# Altium PCB FM Trap.PcbDoc
Units mm, origin at the board's own origin, x right, y up, seen from the top; angles counter-clockwise.
Board outline 19 x 19 mm, 2 copper layers (Top Layer, Bottom Layer); 6 components, 5 nets, 16 pads, 0 vias.
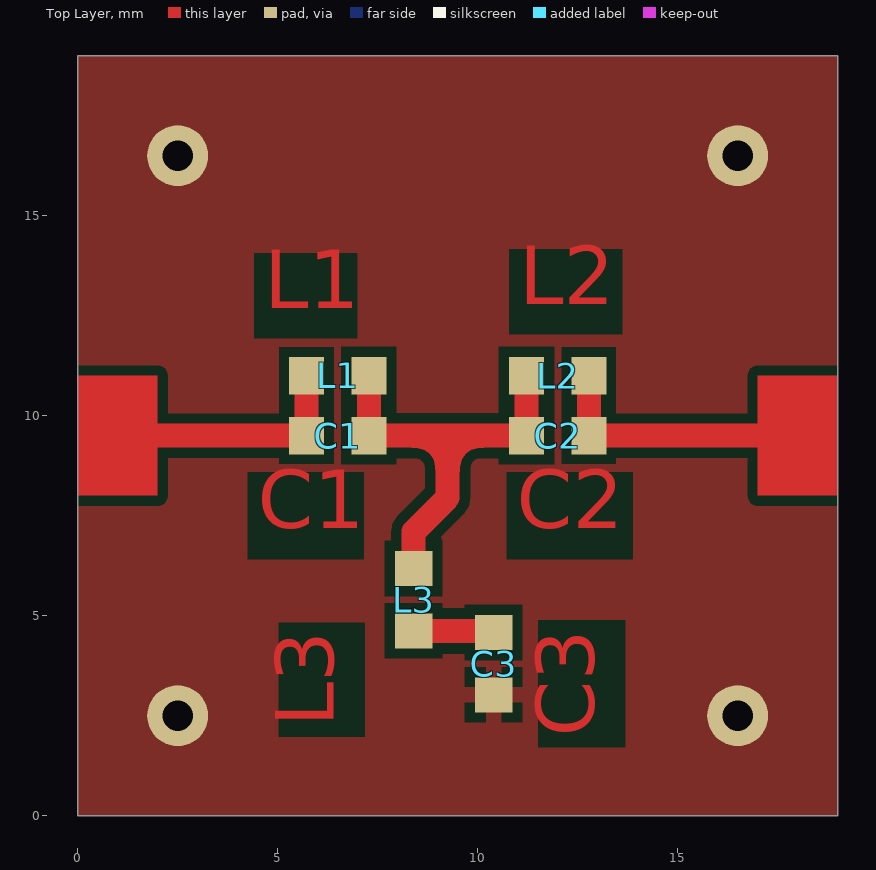
[diagram p0: Top Layer view]
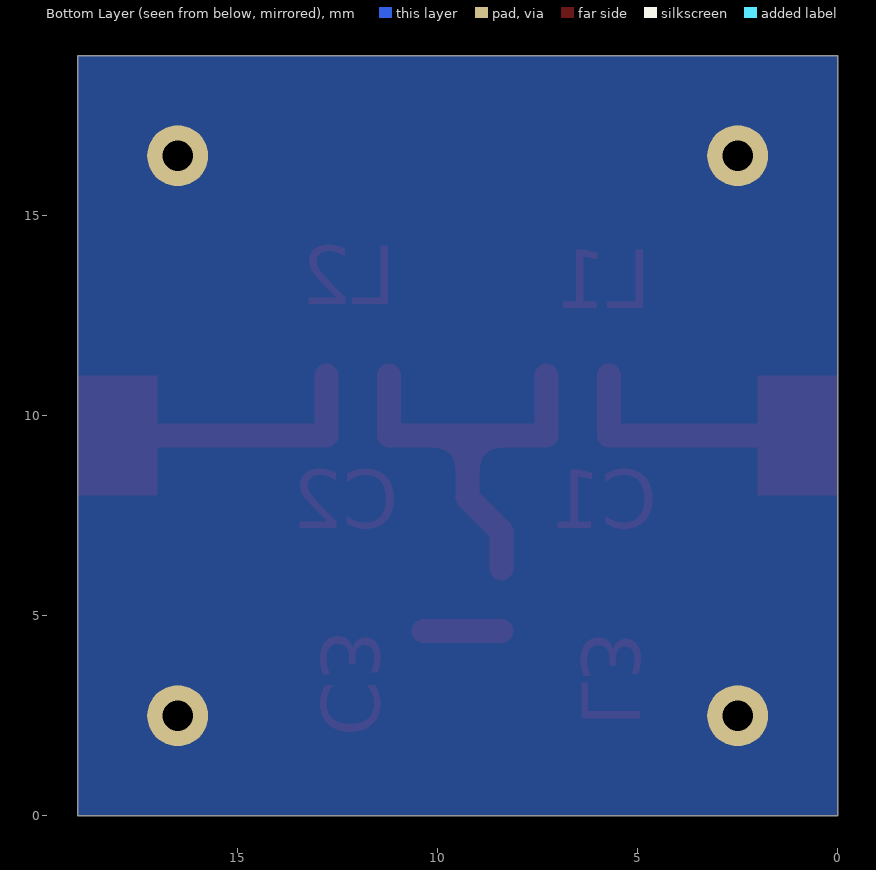
[diagram p1: Bottom Layer view, seen from below]
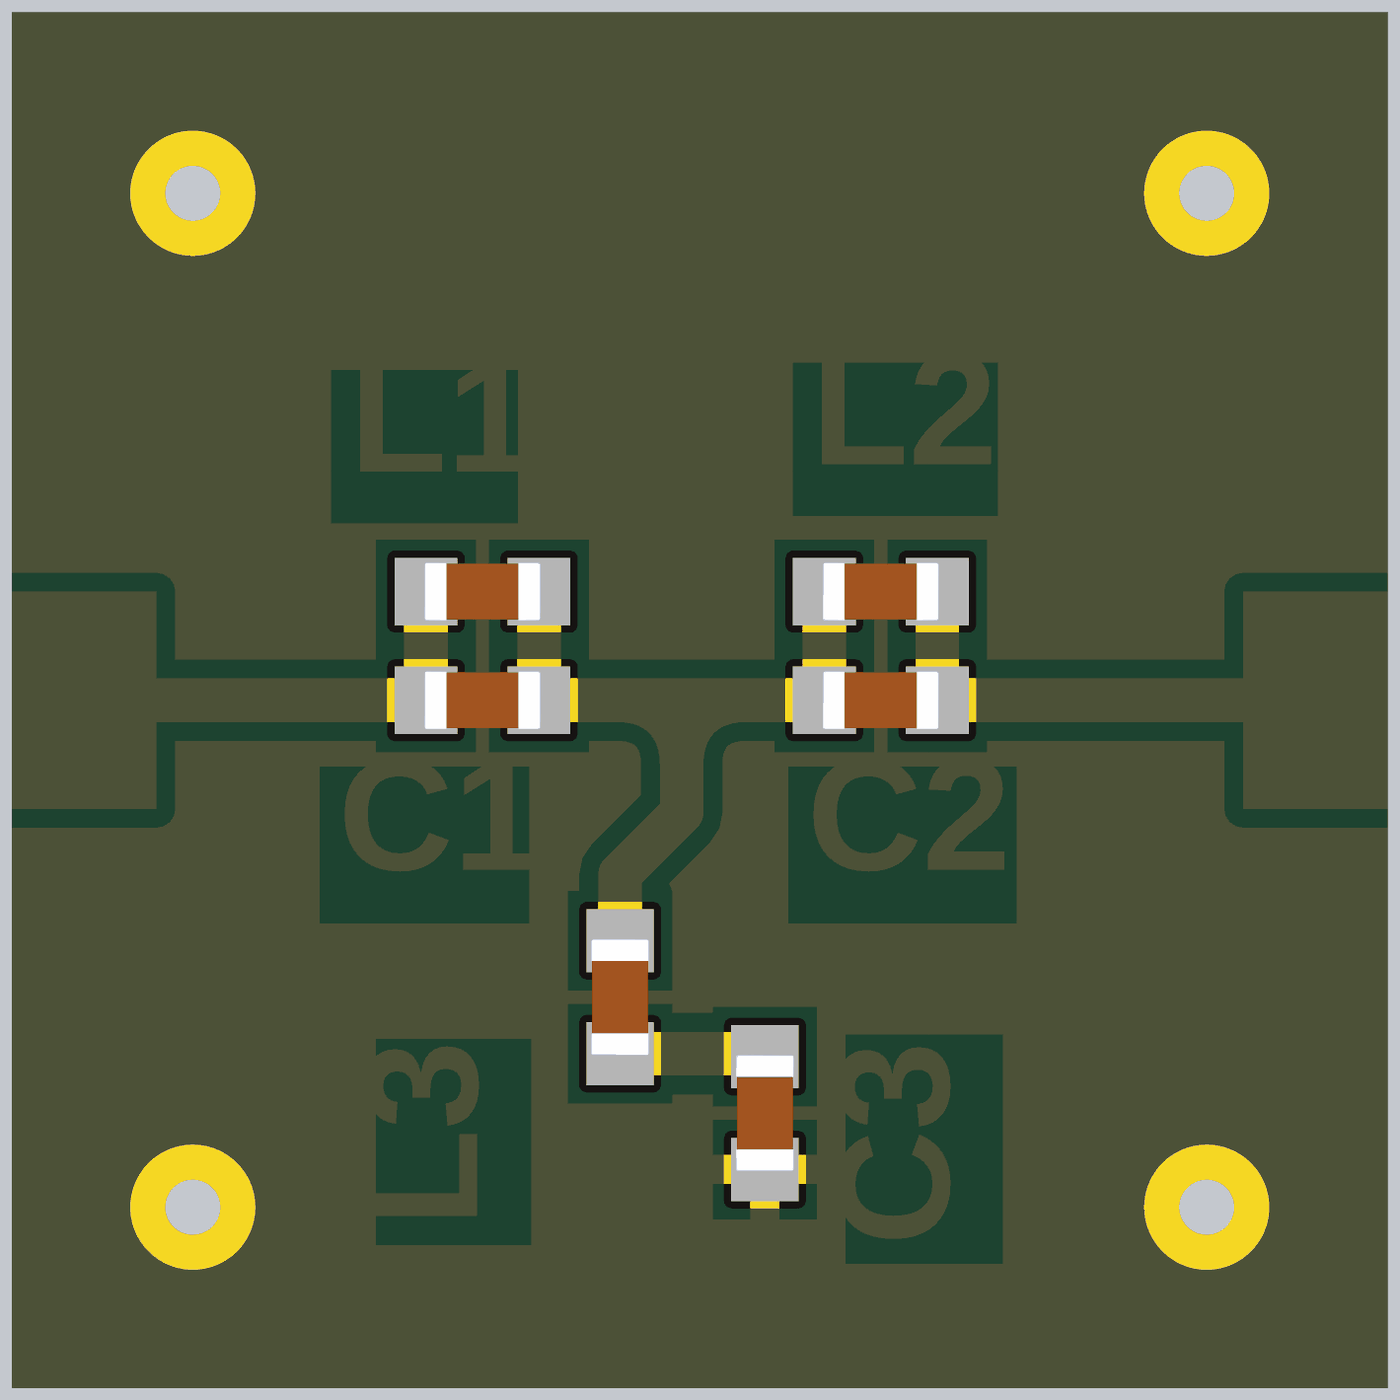
[diagram p2: 3D render of the assembled board from above, using the file's embedded part models]

## Layer stack, top to bottom
Top Solder: solder mask 0.0102, Solder Resist, Dk 3.5
Top Layer: signal copper 0.0356
Dielectric 1: dielectric 0.32, FR-4, Dk 4.8
Bottom Layer: signal copper 0.0356
Bottom Solder: solder mask 0.0102, Solder Resist, Dk 3.5

## Board outline
0,0 19,0 19,19 0,19

## Design rules (kind name [scope] priority, off if disabled: settings)
Clearance [All] p1: gap=0.254 ignorepadtopadclearanceinfootprint=FALSE except(0: Arc-Hole Track-Hole SMDPad-Hole THPad-Hole Via-Hole Fill-Hole Poly-Hole Region-Hole Text-Hole)
PlaneConnect [All] p1: planeconnectstyle=Direct reliefexpansion=0.508 reliefentries=4 reliefconductorwidth=0.254 reliefairgap=0.254
PolygonConnect [All] p1: thpad.connectstyle=Direct thpad.reliefconductorwidth=0.254 thpad.reliefentries=4 thpad.polygonreliefangle="90 Angle" thpad.airgapwidth=0.254 smdpad.connectstyle=Relief smdpad.reliefconductorwidth=0.4 smdpad.reliefentries=4 smdpad.polygonreliefangle="90 Angle" smdpad.airgapwidth=0.254 via.connectstyle=Direct via.reliefconductorwidth=0.254 via.reliefentries=4 via.polygonreliefangle="90 Angle" via.airgapwidth=0.254
RoutingVias [All] p1: holewidth=0.711 width=1.27 viastyle="Through Hole" minholewidth=0.711 minwidth=1.27 maxholewidth=0.711 maxwidth=1.27
SolderMaskExpansion [All] p1: expansion=0.102 istentingtop=FALSE
Width [All] p1: maxlimit=2 minlimit=0.254 preferedwidth=0.254
29 further rules are at their usual default settings.

## Components (designator, comment, footprint, x,y, rotation, side; value= is the part's Value field where it differs from the comment)
C1 "56p" 0603_CAP 6.5,9.5 r0 top
C2 "56p" 0603_CAP 12,9.5 r0 top
C3 "22p" 0603_CAP 10.4,3.8 r270 top
L1 "45n" 0603_CAP 6.5,11 r0 top
L2 "45n" 0603_CAP 12,11 r0 top
L3 "126n" 0603_CAP 8.4,5.4 r90 top

## Footprints (in the part's own frame and the unit in brackets; to place one, negate y for a bottom-side part, rotate by r counter-clockwise, add the part's x,y. Pads: shape width x height; smd on the part's side, far side on the other; paste and mask are expansions set on the pad)
0603_CAP [mm]
  rect 0.87x0.93 smd: 1(-0.78,0) 2(0.78,0)
  body extent -0.8,-0.4 0.8,0.4, height 0.45

## Part data
C1 C2 C3: library part CAP_0603_generic
L1 L2 L3: library part IND_air_0603_generic

## Free pads (board coordinates)
  round 1.524 hole 0.762: 36(2.5,2.5) 38(2.5,16.5) 39(16.5,16.5) 40(16.5,2.5)

## Nets (pads, with @x,y where several pads share a name; then routed paths per layer and width w, separated by ;. In a path a pad name is that pad's centre, name@x,y a point inside that pad or via, vN(x,y) a via of type N, cw(c..) or ccw(c..) an arc to the next point about the centre after c; other vN are vias at no path point)
GND: C3.2 pad.36 pad.38 pad.39 pad.40
NetC1_1: C1.1 L1.1 | length 6
  Top Layer w0.254: 1.3,9.4 1.4,9.5 ; L1.1 L1.1@5.74,11.02
  Top Layer w0.6: 1.4,9.5 C1.1 L1.1
NetC1_2: C1.2 C2.1 L1.2 L2.1 L3.2 | length 10.6
  Top Layer w0.6: L1.2 C1.2 9.25,9.5 ; L3.2 8.4,7.1 9.25,7.95 9.25,9.5 ; L2.1 C2.1 9.25,9.5
NetC2_2: C2.2 L2.2 | length 6.7
  Top Layer w0.6: L2.2 C2.2 18,9.5
NetC3_1: C3.1 L3.1 | length 2
  Top Layer w0.254: C3.1@10.36,4.62 C3.1
  Top Layer w0.6: L3.1 C3.1@10.36,4.62

## Polygon pours and split planes (outlines as drawn)
GND on Bottom Layer "GND_L02_P000" (solid, pour order 0): 0,0 0,19 19,19 19,0
GND on Top Layer "GND_L01_P004" (solid, pour order 4): 0,19 0,0 19,0 19,19

## Other copper
Top Layer:
  rectangle net NetC2_2: 17,8 19,11
  rectangle net NetC1_1: 0,8 2,11